# Altium PCB PCB1.PcbDoc
Units mm, origin at the board's own origin, x right, y up, seen from the top; angles counter-clockwise.
Board outline 65 x 60 mm, 2 copper layers (Top Layer, Bottom Layer); 40 components, 25 nets, 116 pads, 4 vias.
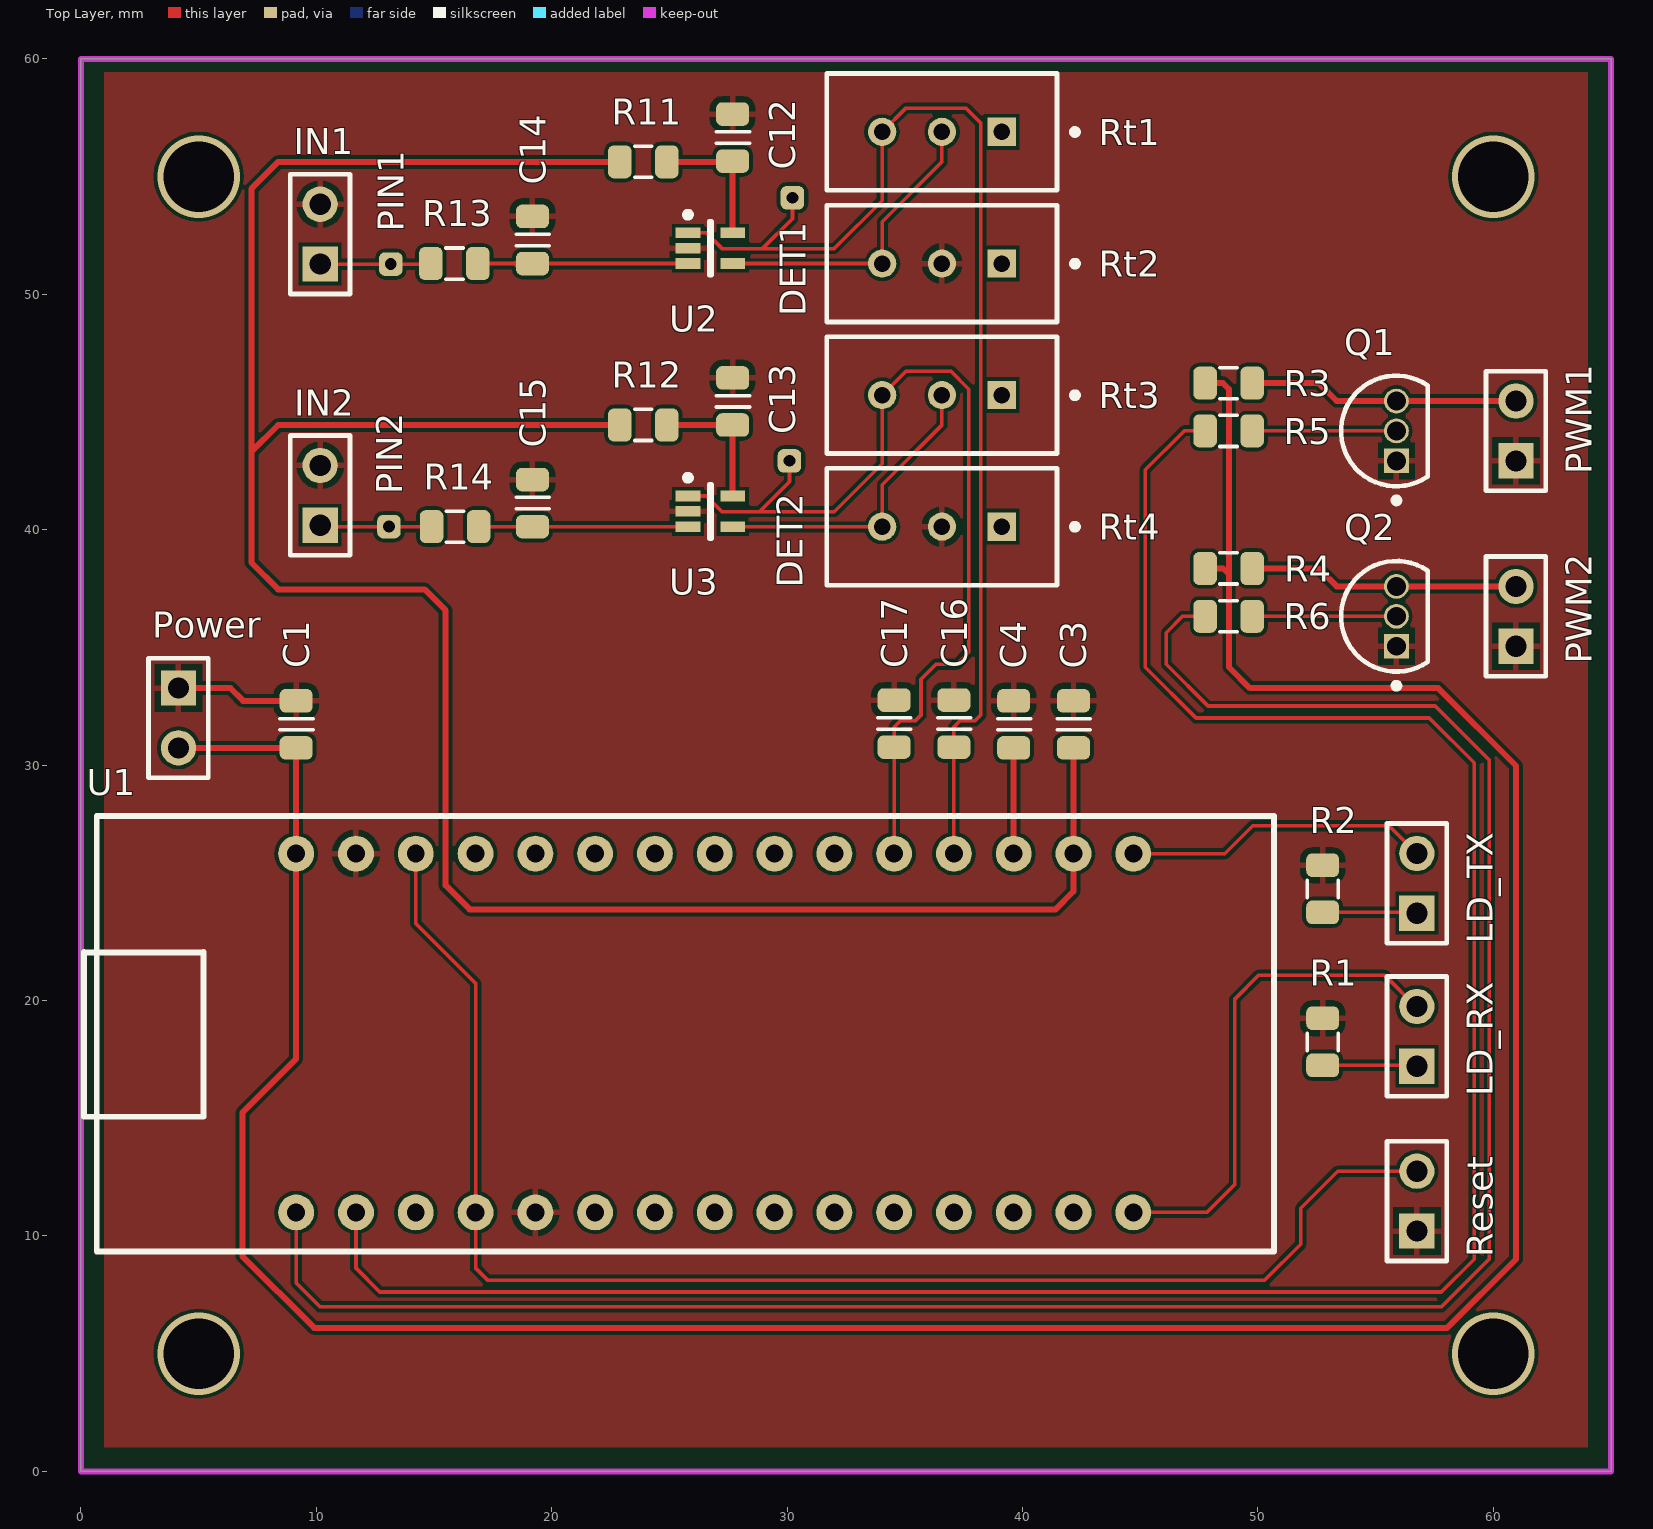
[diagram p0: Top Layer view]
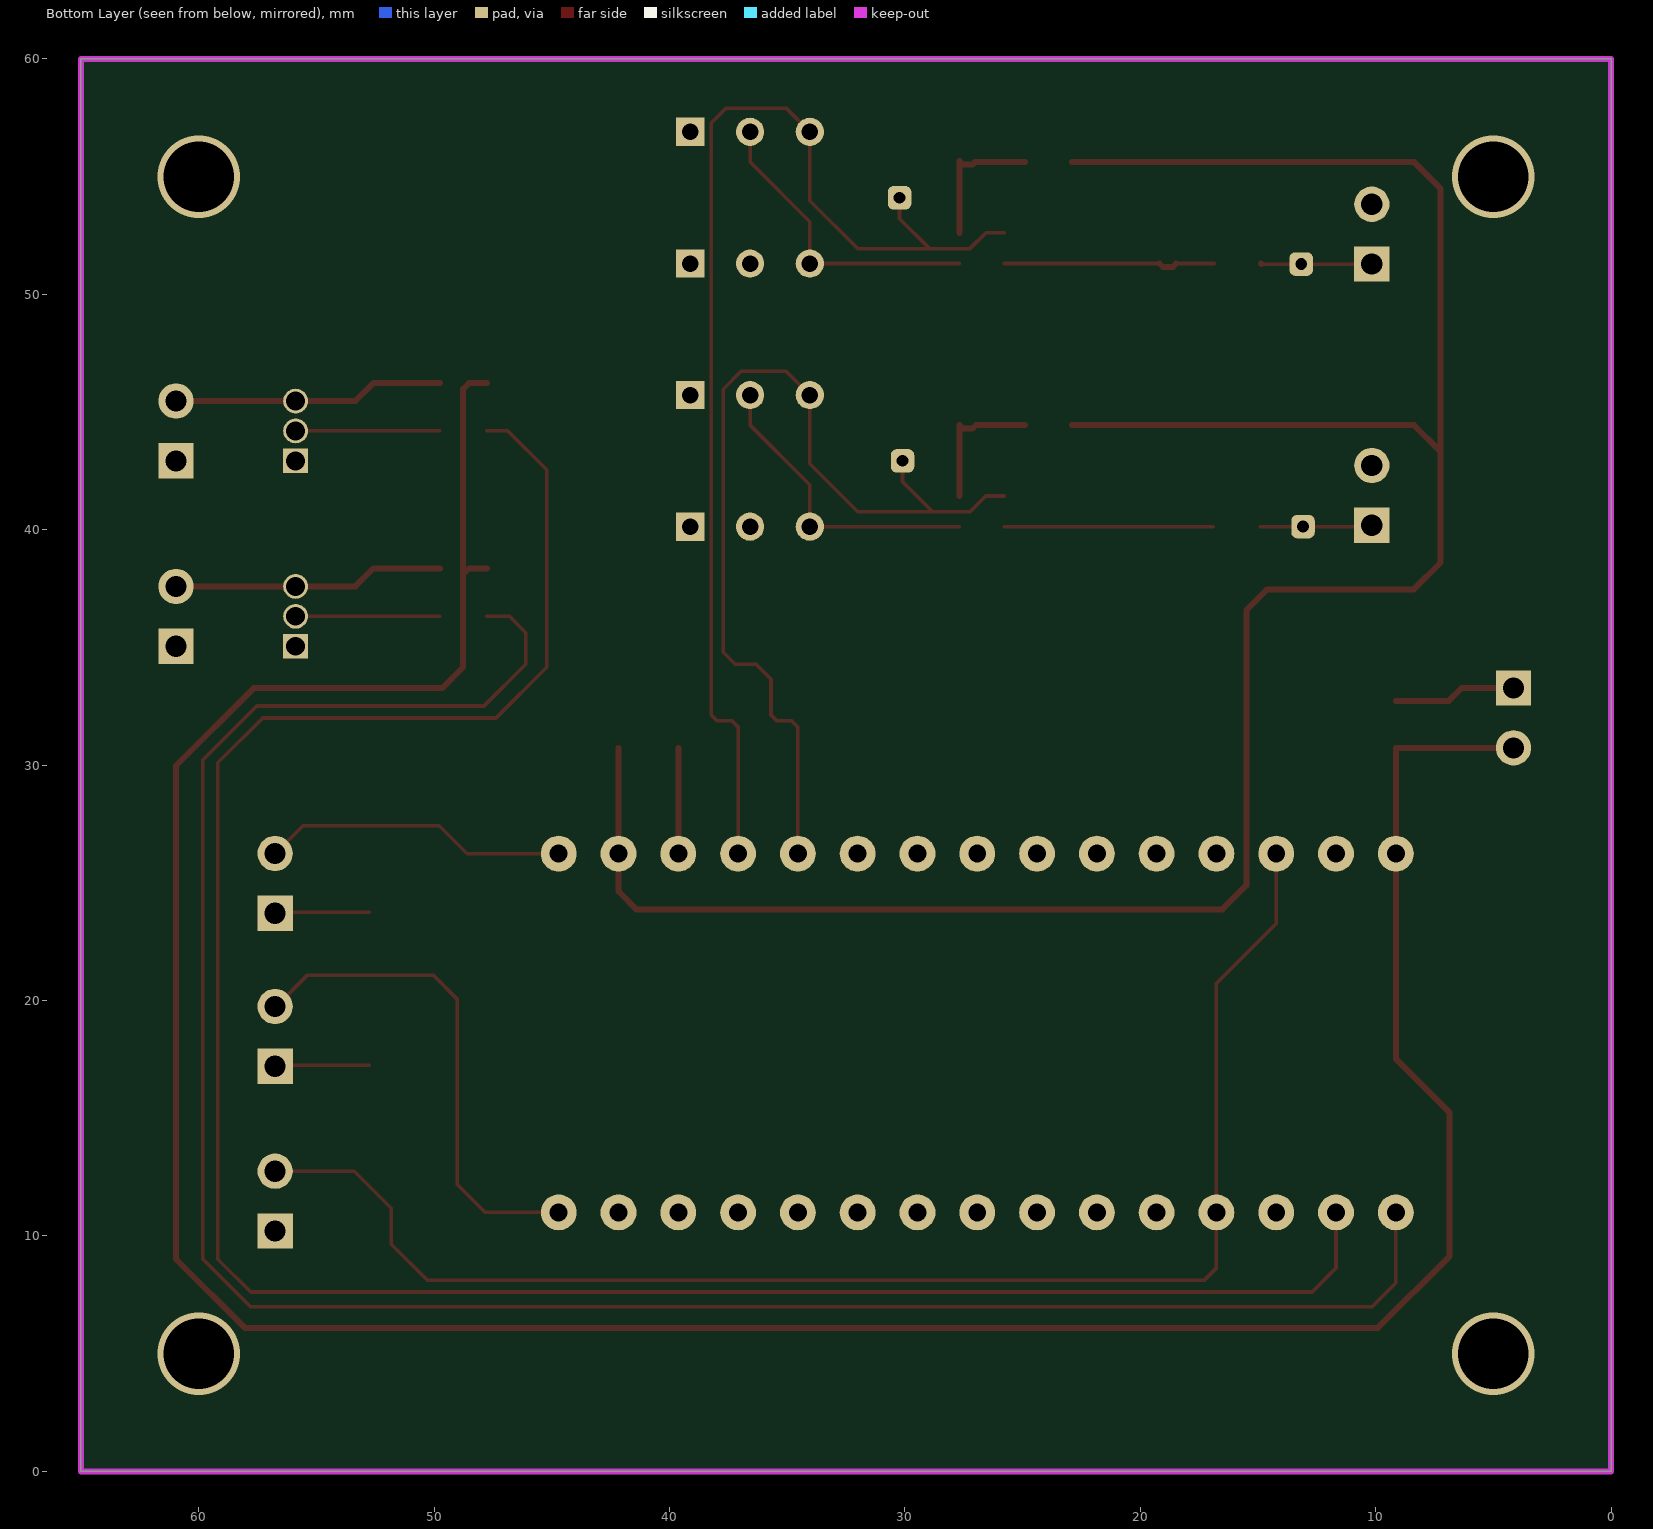
[diagram p1: Bottom Layer view, seen from below]

## Layer stack, top to bottom
Top Solder: solder mask 0.0102, Solder Resist, Dk 3.5
Top Layer: signal copper 0.0356
Dielectric 1: dielectric 0.32, FR-4, Dk 4.8
Bottom Layer: signal copper 0.0356
Bottom Solder: solder mask 0.0102, Solder Resist, Dk 3.5

## Board outline
0,0 65,0 65,60 0,60

## Design rules (kind name [scope] priority, off if disabled: settings)
Clearance [All] p1: gap=0.152 ignorepadtopadclearanceinfootprint=FALSE
PolygonConnect [All] p1: connectstyle=Relief reliefconductorwidth=0.254 reliefentries=4 polygonreliefangle="90 Angle" airgapwidth=0.254
RoutingVias [All] p1: holewidth=0.4 width=0.6 viastyle="Through Hole" minholewidth=0.4 minwidth=0.6 maxholewidth=0.4 maxwidth=0.6
SolderMaskExpansion [All] p1: expansion=0.102 istentingtop=FALSE
Width [All] p1: maxlimit=0.254 minlimit=0.152 preferedwidth=0.152
30 further rules are at their usual default settings.

## Classes and differential pairs
component class Input: C12 C13 C14 C15 C16 C17 DET1 DET2 IN1 IN2 PIN1 PIN2 R11 R12 R13 R14 Rt1 Rt2 Rt3 Rt4 U2 U3
component class Control: C1 C3 C4 LD_RX LD_TX Power PWM1 PWM2 Q1 Q2 R1 R2 R3 R4 R5 R6 Reset U1

## Components (designator, comment, footprint, x,y, rotation, side; value= is the part's Value field where it differs from the comment)
C1 "10uF 16V" 0805_C 9.144,30.734 r90 top
C3 "10uF 16V" 0805_C 42.164,30.734 r90 top
C4 "10uF 16V" 0805_C 39.624,30.734 r90 top
C12 "1uF 16V" 0805_C 27.686,55.658 r90 top
C13 "1uF 16V" 0805_C 27.686,44.45 r90 top
C14 "10nF 16V" 0805_C 19.182,51.308 r90 top
C15 "10nF 16V" 0805_C 19.182,40.132 r90 top
C16 "10nF 16V" 0805_C 37.084,30.766 r90 top
C17 "10nF 16V" 0805_C 34.544,30.766 r90 top
DET1 "Point" Test_Point 30.226,54.102 r90 top
DET2 "Point" Test_Point 30.099,42.926 r90 top
IN1 "IN1" HDR1X2 10.164,51.286 r90 top
IN2 "IN2" HDR1X2 10.164,40.19 r90 top
LD_RX "UART_RX" HDR1X2 56.75,17.21 r90 top
LD_TX "UART_TX" HDR1X2 56.75,23.71 r90 top
PIN1 "Point" Test_Point 13.164,51.286 r90 top
PIN2 "Point" Test_Point 13.086,40.132 r90 top
Power "Pow In" HDR1X2 4.144,33.274 r270 top
PWM1 "PWM1" HDR1X2 60.96,42.926 r90 top
PWM2 "PWM2" HDR1X2 60.96,35.052 r90 top
Q1 "2N3904" ONSC-TO-92-3-29-11 55.88,44.196 r90 top
Q2 "2N3904" ONSC-TO-92-3-29-11 55.88,36.322 r90 top
R1 "600R" 0805_R 52.75,19.25 r270 top
R2 "600R" 0805_R 52.75,25.75 r270 top
R3 "600R" 0805_R 49.752,46.228 r180 top
R4 "600R" 0805_R 49.752,38.354 r180 top
R5 "200R" 0805_R 47.752,44.196 r0 top
R6 "200R" 0805_R 47.752,36.322 r0 top
R11 "22R" 0805_R 24.892,55.626 r180 top
R12 "22R" 0805_R 24.892,44.45 r180 top
R13 "22R" 0805_R 14.864,51.308 r0 top
R14 "22R" 0805_R 14.896,40.132 r0 top
Reset "Reset" HDR1X2 56.75,10.21 r90 top
Rt1 "3296W-1-503LF" FP-3296W-MFG 36.576,56.896 r0 top value=500kΩ
Rt2 "3296W-1-503LF" FP-3296W-MFG 36.576,51.303 r0 top value=500kΩ
Rt3 "3296W-1-503LF" FP-3296W-MFG 36.576,45.715 r0 top value=500kΩ
Rt4 "3296W-1-503LF" FP-3296W-MFG 36.576,40.127 r0 top value=500kΩ
U1 "Stm32F303K8-Nucleo board" F303-Nucleo 9.144,11 r90 top
U2 "MCP6001T-I/LT" SC70-LT5_M 26.736,51.958 r0 top
U3 "MCP6001T-I/LT" SC70-LT5_M 26.736,40.782 r0 top

## Footprints (in the part's own frame and the unit in brackets; to place one, negate y for a bottom-side part, rotate by r counter-clockwise, add the part's x,y. Pads: shape width x height; smd on the part's side, far side on the other; paste and mask are expansions set on the pad)
0805_C [mm]
  rrect50% 1x1.4 smd: 1(0,0) 2(2,0)
  Top Layer region: 0.024,0.339 0.024,0.339 0.024,0.339 0.024,0.339
  Top Layer region: 0.024,0.339 0.024,0.339 0.024,0.339 0.024,0.339
  silkscreen extent 0.76,-0.71 1.24,0.69
0805_R [mm]
  rrect50% 1x1.4 smd: 1(0,0) 2(2,0)
  Top Layer region: 0.024,0.339 0.024,0.339 0.024,0.339 0.024,0.339
  Top Layer region: 0.024,0.339 0.024,0.339 0.024,0.339 0.024,0.339
  silkscreen extent 0.63,-0.66 1.37,0.66
F303-Nucleo [mil]
  round 60 hole 30: 1(0,0) 2(0,-100) 3(0,-200) 4(0,-300) 5(0,-400) 6(0,-500) 7(0,-600) 8(0,-700) 9(0,-800) 10(0,-900) 11(0,-1000) 12(0,-1100) 13(0,-1200) 14(0,-1300) 15(0,-1400) 16(600,-1400) 17(600,-1300) 18(600,-1200) 19(600,-1100) 20(600,-1000) 21(600,-900) 22(600,-800) 23(600,-700) 24(600,-600) 25(600,-500) 26(600,-400) 27(600,-300) 28(600,-200) 29(600,-100) 30(600,0)
  silkscreen extent -65,-1635 663,355
FP-3296W-MFG [mm]
  rect 1.2x1.2 hole 0.7 paste-1000 mask+0: 1(2.54,0.005)
  round 1.2 hole 0.7 paste-1000 mask+0: 2(0,0.005) 3(-2.54,0.005)
  silkscreen extent -4.89,-2.48 5.77,2.48, body extent -4.99,-2.58 4.99,2.58, height 0.25
HDR1X2 [mm] "Connector; Header; 2 Position"
  rect 1.5x1.5 hole 0.9: 1(0,0)
  round 1.5 hole 0.9: 2(2.54,0)
  silkscreen extent -1.27,-1.27 3.81,1.27
ONSC-TO-92-3-29-11 [mm] "TO, 3-Leads, Body Dia 4.7mm, Pitch 1.27mm"
  rect 1.05x1.05 hole 0.8: 1(-1.27,0)
  round 1.05 hole 0.8: 2(0,0) 3(1.27,0)
  silkscreen extent -3.07,-1.34 2.35,2.35, body extent -2.35,-1.33 2.36,2.36, height 7.87
SC70-LT5_M [mm] "SOT353, 5-Leads, Body 2x1.3mm, Pitch 0.65mm, Lead Span 2.1mm, IPC Low Density"
  rect 1.05x0.45 smd: 1(-0.95,0.65) 2(-0.95,0) 3(-0.95,-0.65) 4(0.95,-0.65) 5(0.95,0.65)
  silkscreen extent -1.07,-1.15 0.05,1.55, body extent -0.67,-1.12 0.68,1.13, height 1.1
Test_Point [mm]
  rrect50% 1x1 hole 0.5: 1(0,0)

## Part data
C1 C3 C4 C12 C13 C14 C15 C16 C17: library part Cap
IN1 IN2 LD_RX LD_TX Power PWM1 PWM2 Reset: library part "Header 2", "Header, 2-Pin", LatestRevisionDate=17-Jul-2002, LatestRevisionNote="Re-released for DXP Platform.", Publisher="Altium Limited"
Q1 Q2: library part CMP-2000-05562-1, "General Purpose Transistor, NPN Silicon, 200 mA, 60 V, -55 to 150 degC, 3-Pin TO-92, RoHS, Bulk", Collector- Base Voltage VCBO=60V, Collector- Emitter Voltage VCEO Max=40V, Collector-Emitter Saturation Voltage=0.3V, Emitter- Base Voltage VEBO=6V, Manufacturer=ONSemiconductor, Maximum DC Collector Current=0.2A, Maximum Operating Temperature=+150C, Maximum Power Dissipation=625mW, Minimum Operating Temperature=-65C, Package / Case=TO-92-3(TO-226), Package Description="3-Pin Transistor Outline, Body 4.825 x 3.685 mm, Pitch 1.27 mm", Package Reference=TO-92-3-29-11, Brand=ONSemiconductor, Configuration=Single, Datasheet URL=https://datasheet.ciiva.com/4725/2n3903-d-285841-4725808.pdf, Datasheet Version="Rev. 8, 08/2012", DC Collector/Base Gain hfe Min=60, Factory Pack Quantity=5000, Gain Bandwidth Product fT=270MHz, Manufacturer URL=http://www.onsemi.com/, Mounting Style=ThroughHole, Mounting Technology=ThroughHole, Packaging=Bulk, Product Category=BipolarTransistors-BJT, RoHS=Details, Transistor Polarity=NPN
R1 R2 R3 R4 R5 R6 R11 R12 R13 R14: library part Res
Rt1 Rt2 Rt3 Rt4: library part CMP-2000-05583-2, "TRIMMER 50K OHM 0.5W PC PIN TOP", Manufacturer=Bourns, Manufacturer Part Number=3296W-1-504LF, Package=3296W, Power Rating=0.5W, Resistance=500kΩ, Temperature="-55°C to +125°C", Temperature Coefficient=100ppm/°C, Temperature Range High=+125°C, Temperature Range Low=-55°C, Tolerance=10%, Voltage Rating=300V, Automotive=No, Category=Res, ComponentLink2Description=Datasheet, ComponentLink2URL=https://www.bourns.com/docs/Product-Datasheets/3296.pdf, Device Class L1="Passive Components", Device Class L2=Resistors, Device Class L3="Variable Resistors and Potentiometers", Digikey Description="TRIMMER 500K OHM 0.5W PC PIN TOP", Height=12.05mm, Lead Free=Yes, Mouser Description="Trimmer; Cermet; Rest 500 Kilohms; PCB; 25 Turns; Pwr-Rtg 0.5W", Octopart=https://octopart.com/3296w-1-504lf-bourns-143884, RoHS=TRUE, Series="Trimpot 3296-Sealed", Standoff Height=0.38mm
U1: library part F303-Nucleo
U2 U3: library part CMP-0187-00457-2, "1 MHz, Low-Power Operational Amplifier, 5-Pin SC-70, Industrial Temperature, Tape and Reel", Code_IPC=SOT353-5, ComponentLink1Description="Manufacturer URL", ComponentLink1URL=http://www.microchip.com/, ComponentLink2Description=Datasheet, ComponentLink2URL=http://ww1.microchip.com/downloads/en/DeviceDoc/21733j.pdf, ComponentLink3Description="Package Specification", ComponentLink3URL=http://www.microchip.com/stellent/groups/techpub_sg/documents/packagingspec/en012702.pdf, DatasheetVersion="revJ, Nov-2009", PackageDescription="5-Lead Plastic Small Outline Transistor (LT) [SC70]", PackageReference=SC70-LT5, PackageVersion="revBB, Aug-2009", RevisionNote="URLs added."

## Via types
v1: diameter 3.5, hole 3, Top Layer to Bottom Layer, 4 vias

## Nets (pads, with @x,y where several pads share a name; then routed paths per layer and width w, separated by ;. In a path a pad name is that pad's centre, name@x,y a point inside that pad or via, vN(x,y) a via of type N, cw(c..) or ccw(c..) an arc to the next point about the centre after c; other vN are vias at no path point)
+3.3: C3.1 R11.2 R12.2 U1.17 | length 102.4
  Top Layer w0.254: R12.2 8.382,44.45 7.239,43.307 ; R11.2 8.382,55.626 7.239,54.483 7.239,43.307 ; C3.1 U1.17 42.164,24.638 41.402,23.876 16.51,23.876 15.494,24.892 15.494,36.576 14.605,37.465 8.382,37.465 7.239,38.608 7.239,43.307
DET1_Out: C16.1 DET1.1 Rt1.3 U1.19 U2.1 | length 51.7
  Top Layer w0.152: U2.1 26.565,52.608 27.23,51.943 28.956,51.943 ; DET1.1 30.226,53.213 28.956,51.943 ; U1.19 C16.1 37.084,31.623 37.338,31.877 37.973,31.877 38.227,32.131 38.227,57.277 37.592,57.912 35.047,57.912 Rt1.3 34.036,53.975 32.004,51.943 28.956,51.943
DET2_Out: C17.1 DET2.1 Rt3.3 U1.20 U3.1 | length 41.3
  Top Layer w0.152: U3.1 26.565,41.432 27.23,40.767 28.829,40.767 ; DET2.1 30.099,42.037 28.829,40.767 ; U1.20 C17.1 34.544,31.623 34.798,31.877 35.433,31.877 35.687,32.131 35.687,33.655 36.322,34.29 37.211,34.29 37.719,34.798 37.719,45.974 36.962,46.731 35.047,46.731 Rt3.3 34.036,42.799 32.004,40.767 28.829,40.767
GND: C1.2 C3.2 C4.2 C12.2 C13.2 C14.2 C15.2 C16.2 C17.2 IN1.2 IN2.2 Power.1 PWM1.1 PWM2.1 Q1.1 Q2.1 R1.1 R2.1 Reset.1 Rt2.2 Rt4.2 U1.5 U1.29 U2.2 U3.2 | length 5.2
  Top Layer w0.254: Power.1 6.354,33.274 6.894,32.734 C1.2
NetC4_1: C4.1 U1.18 | length 4.5
  Top Layer w0.254: U1.18 C4.1
NetC12_1: C12.1 R11.1 U2.5 | length 6
  Top Layer w0.254: R11.1 27.009,55.626 27.122,55.512 27.54,55.512 C12.1 U2.5
NetC13_1: C13.1 R12.1 U3.5 | length 5.9
  Top Layer w0.254: R12.1 26.977,44.45 27.122,44.304 27.54,44.304 C13.1 U3.5
NetC14_1: C14.1 R13.2 U2.3 | length 9
  Top Layer w0.152: R13.2 18.473,51.308 ; C14.1 U2.3
  Top Layer w0.254: 18.473,51.308 18.618,51.162 19.036,51.162 C14.1
NetC15_1: C15.1 R14.2 U3.3 | length 8.9
  Top Layer w0.152: R14.2 C15.1 U3.3
NetIN1_1: IN1.1 PIN1.1 R13.1 | length 4.7
  Top Layer w0.152: IN1.1 PIN1.1 R13.1@14.842,51.286
  Top Layer w0.254: R13.1@14.842,51.286 R13.1
NetIN2_1: IN2.1 PIN2.1 R14.1 | length 4.8
  Top Layer w0.152: IN2.1 10.222,40.132 PIN2.1 R14.1
NetLD_RX_1: LD_RX.1 R1.2 | length 4
  Top Layer w0.152: R1.2 56.71,17.25 LD_RX.1
NetLD_TX_1: LD_TX.1 R2.2 | length 4
  Top Layer w0.152: R2.2 56.71,23.75 LD_TX.1
NetPWM1_2: PWM1.2 Q1.3 R3.1 | length 11.5
  Top Layer w0.254: R3.1 52.578,46.228 53.34,45.466 Q1.3 PWM1.2
NetPWM2_2: PWM2.2 Q2.3 R4.1 | length 11.5
  Top Layer w0.254: R4.1 52.578,38.354 53.34,37.592 Q2.3 PWM2.2
NetQ1_2: Q1.2 R5.2 | length 6.1
  Top Layer w0.152: R5.2 Q1.2
NetQ2_2: Q2.2 R6.2 | length 6.1
  Top Layer w0.152: R6.2 Q2.2
NetReset_2: Reset.2 U1.4 U1.28 | length 61.7
  Top Layer w0.152: U1.28 14.224,23.276 16.764,20.736 U1.4 16.764,8.636 17.272,8.128 50.292,8.128 51.816,9.652 51.816,11.176 53.39,12.75 Reset.2
NetRt1_2: Rt1.2 Rt2.3 U2.4 | length 13
  Top Layer w0.152: U2.4 Rt2.3 34.036,53.086 36.576,55.626 Rt1.2
NetRt3_2: Rt3.2 Rt4.3 U3.4 | length 13
  Top Layer w0.152: U3.4 Rt4.3 34.036,41.91 36.576,44.45 Rt3.2@36.576,45.725
PWM_OUT_1: R5.1 U1.2 | length 99.2
  Top Layer w0.152: U1.2 11.684,8.636 12.7,7.62 57.785,7.62 59.182,9.017 59.182,30.099 57.277,32.004 47.371,32.004 45.212,34.163 45.212,42.545 46.863,44.196 R5.1
PWM_OUT_2: R6.1 U1.1 | length 94.8
  Top Layer w0.152: U1.1 9.144,8.001 10.16,6.985 57.785,6.985 59.817,9.017 59.817,30.226 57.531,32.512 47.879,32.512 46.101,34.29 46.101,35.627 46.796,36.322 R6.1
UART_RX: LD_RX.2 U1.15 | length 21.4
  Top Layer w0.152: U1.15 47.83,11 49.022,12.192 49.022,20.066 50.038,21.082 55.372,21.082 56.704,19.75 LD_RX.2
UART_TX: LD_TX.2 U1.16 | length 13
  Top Layer w0.152: U1.16 48.592,26.24 49.784,27.432 55.568,27.432 LD_TX.2
VIN: C1.1 Power.2 R3.2 R4.2 U1.30 | length 133
  Top Layer w0.254: Power.2 C1.1 U1.30 9.144,17.526 6.858,15.24 6.858,9.144 9.906,6.096 58.039,6.096 60.96,9.017 60.96,29.972 57.658,33.274 49.657,33.274 48.768,34.163 48.768,38.1 ; R4.2 48.514,38.354 48.768,38.1 ; R3.2 48.514,46.228 48.768,45.974 48.768,38.1
pads on no net: Rt1.1 Rt2.1 Rt3.1 Rt4.1 U1.3 U1.6 U1.7 U1.8 U1.9 U1.10 U1.11 U1.12 U1.13 U1.14 U1.21 U1.22 U1.23 U1.24 U1.25 U1.26 U1.27
copper on no net:
  other v1: 5,5 60,5 5,55 60,55

## Polygon pours and split planes (outlines as drawn)
GND on Top Layer "GND_L01_P000" (solid, pour order 0): 1,59.436 1,1.016 64,1.016 64,59.436

## Keep-outs
Keep-Out Layer:
  the board outline again, w0.254